# Altium PCB Startup Delay.PcbDoc
Units mm, origin at the board's own origin, x right, y up, seen from the top; angles counter-clockwise.
Board outline 50.04 x 49.15 mm, 2 copper layers (Top Layer, Bottom Layer); 15 components, 9 nets, 249 pads, 4 vias.
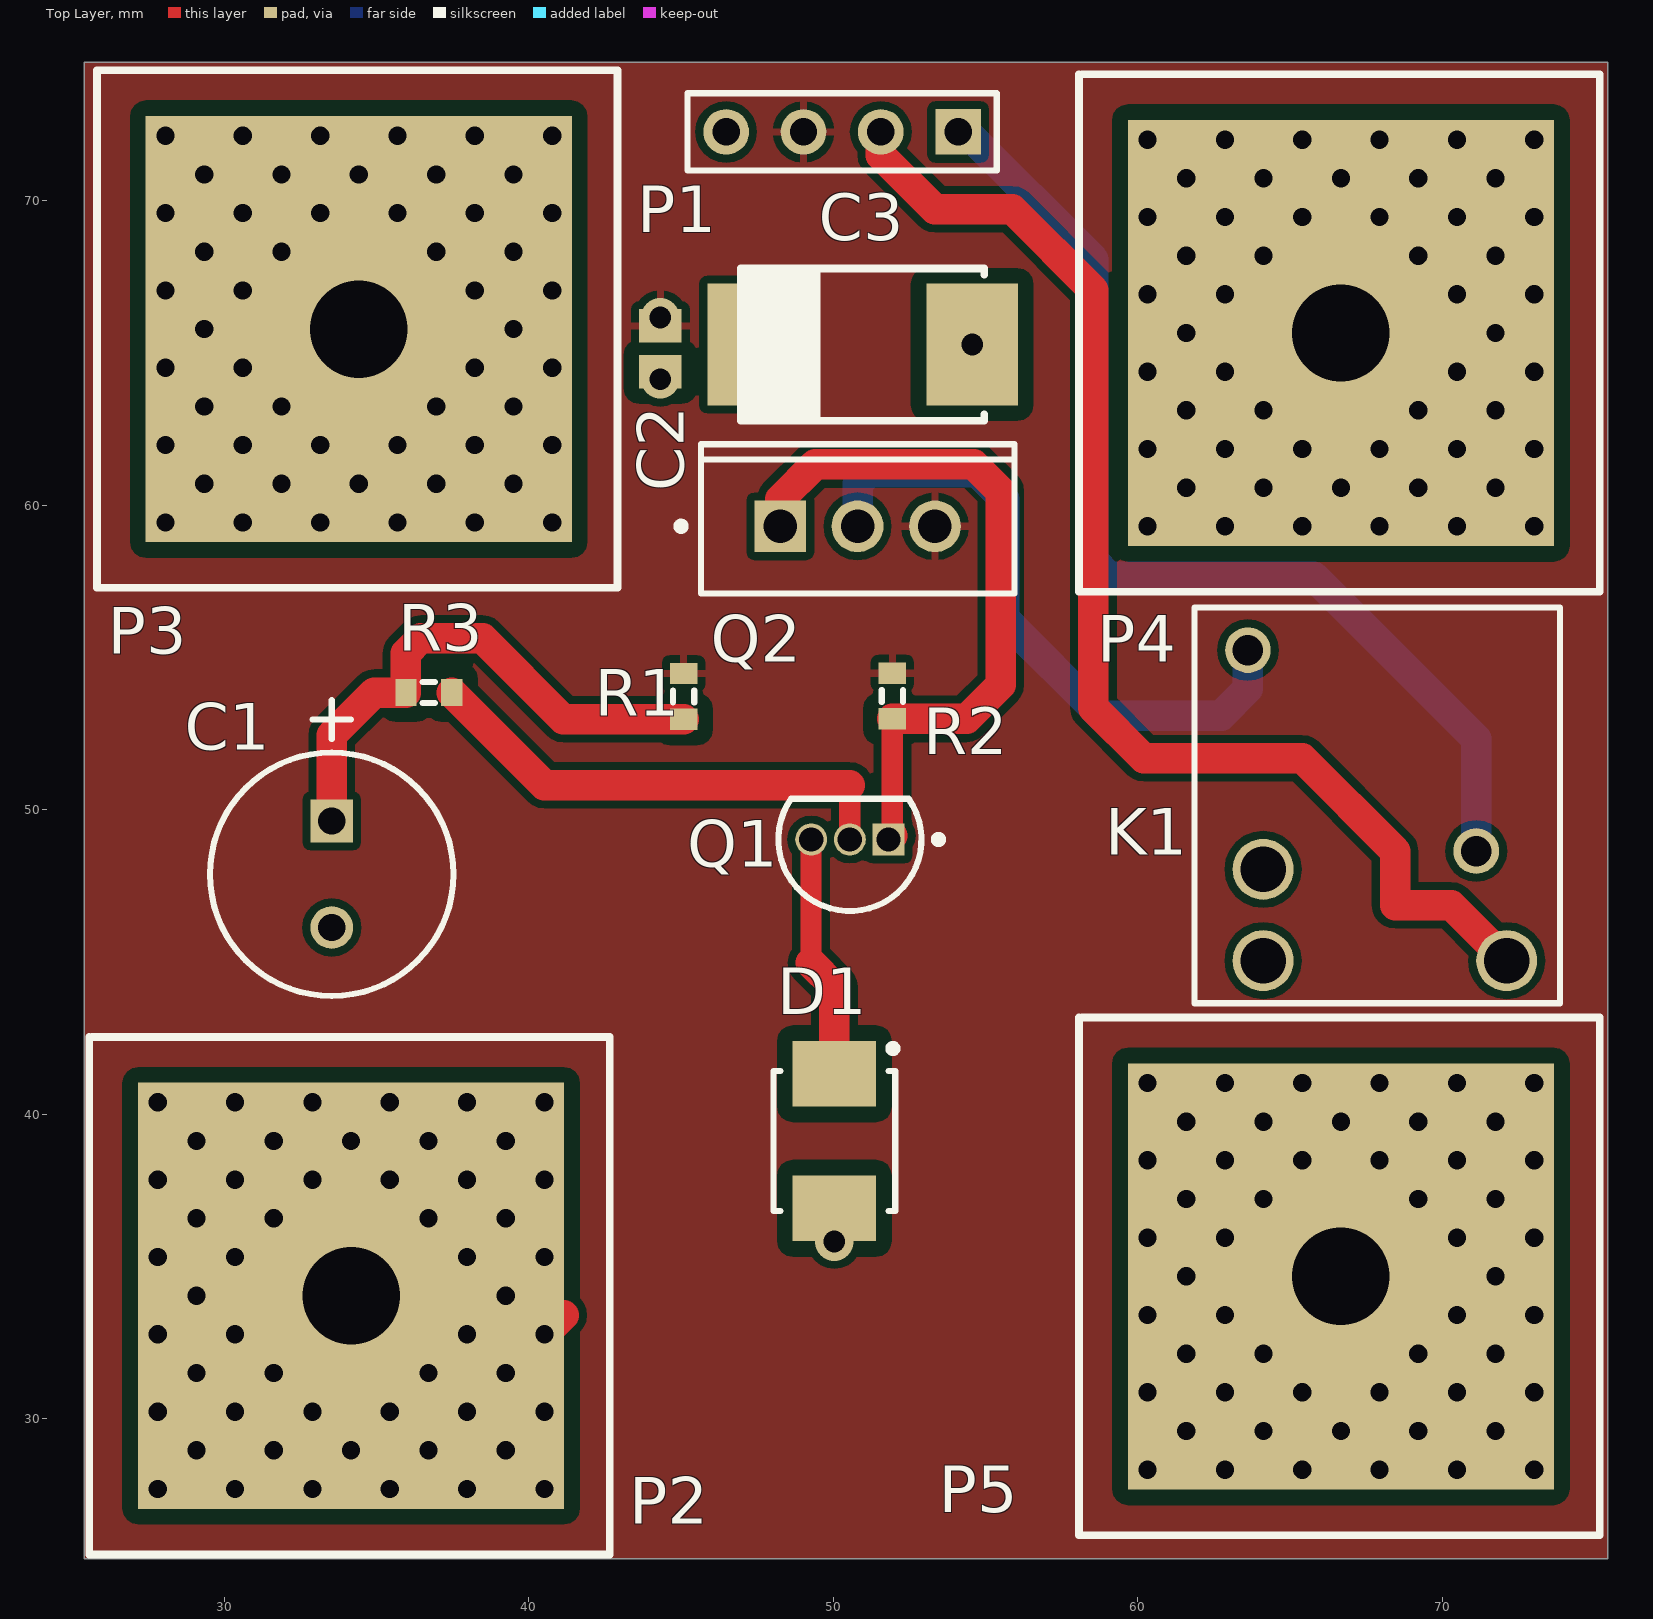
[diagram p0: Top Layer view]
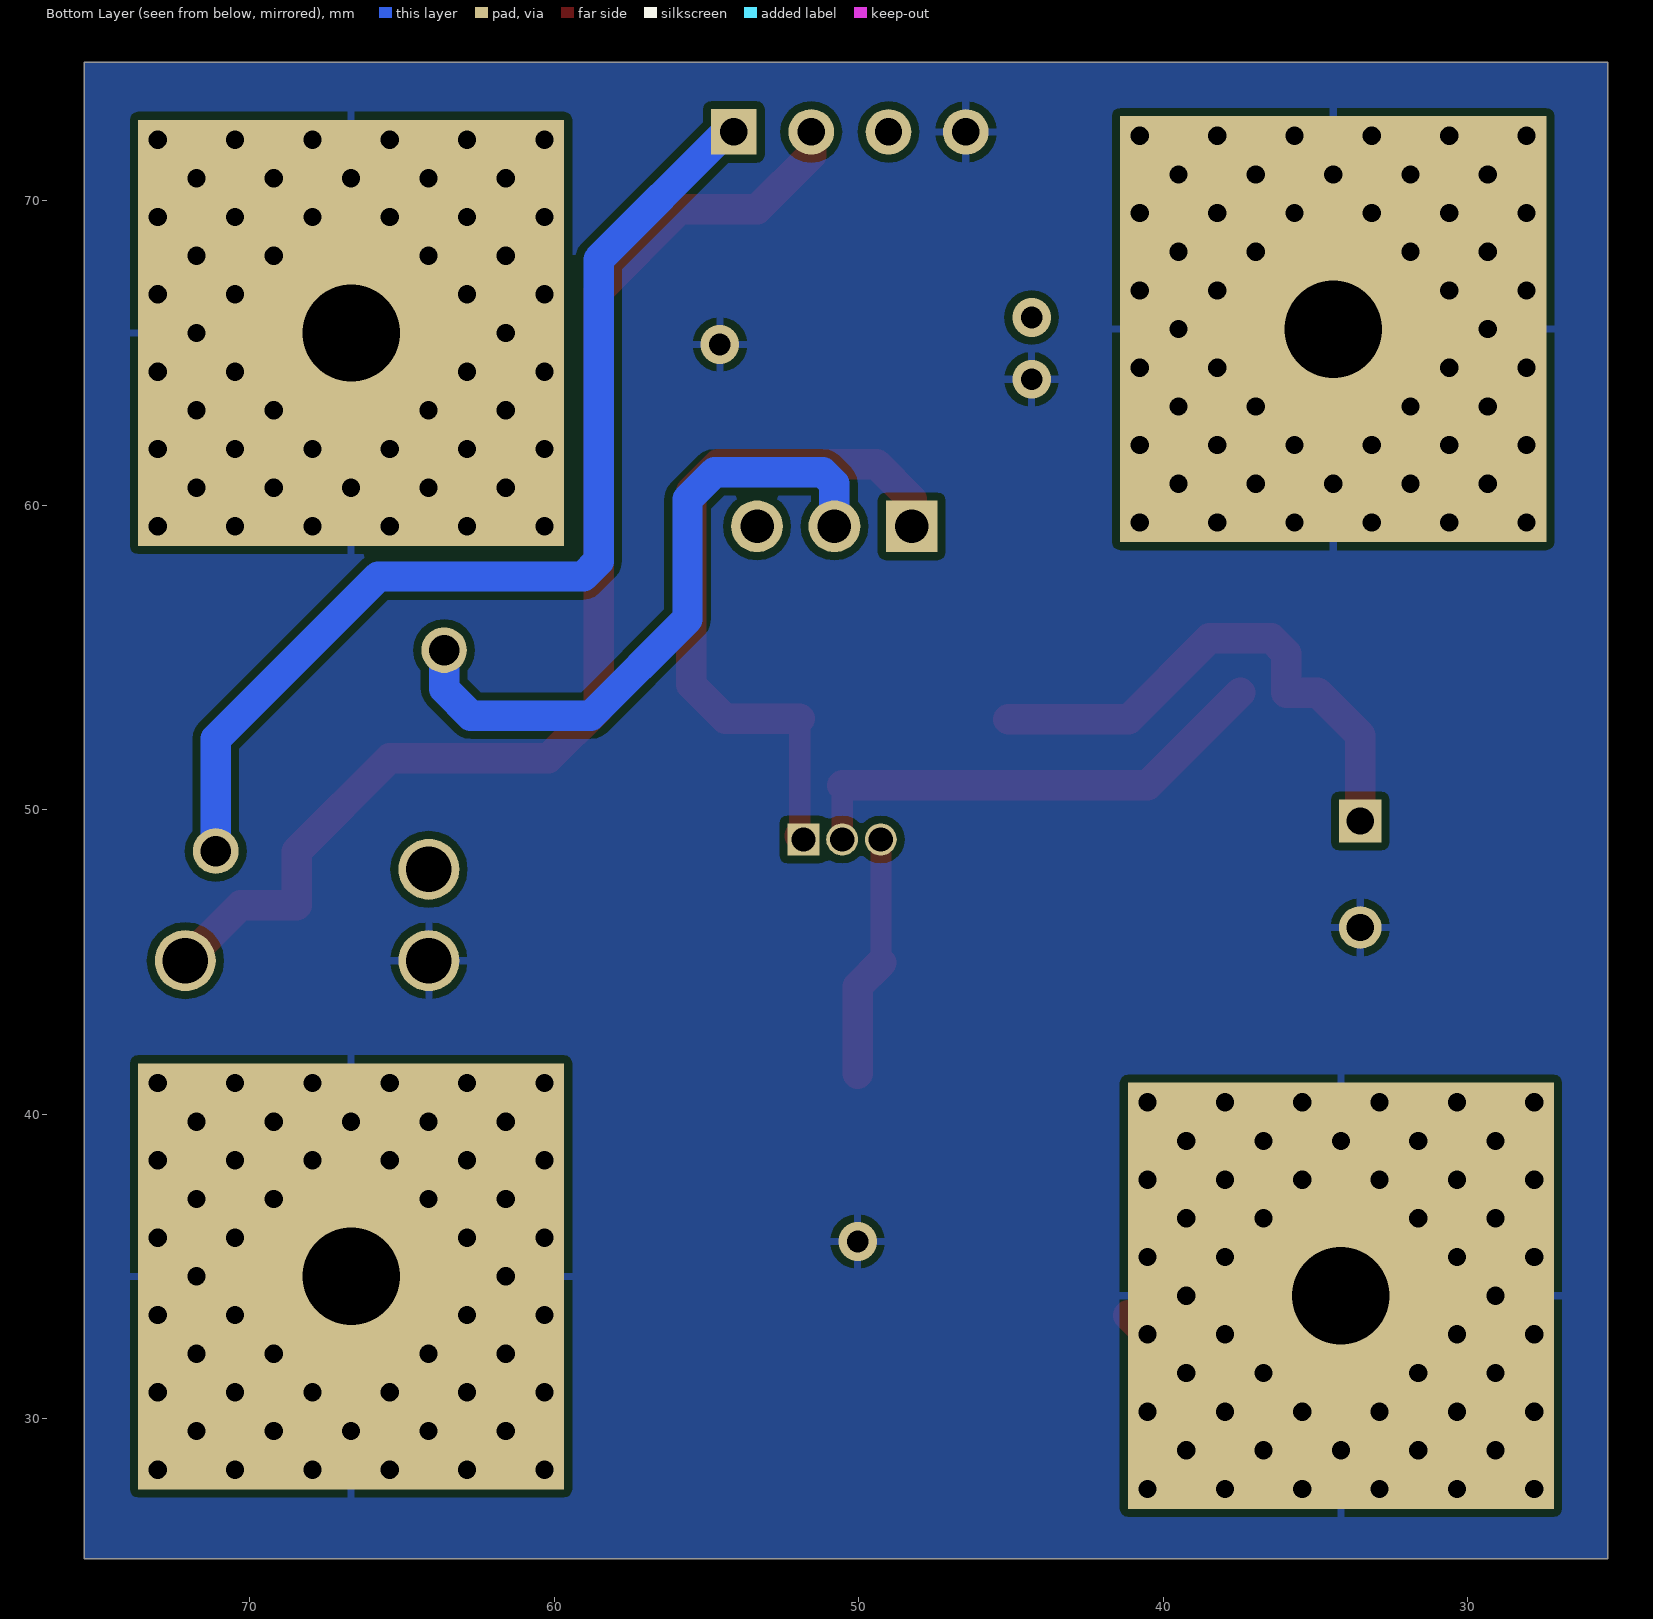
[diagram p1: Bottom Layer view, seen from below]

## Layer stack, top to bottom
Top Solder: solder mask 0.0102, Solder Resist, Dk 3.5
Top Layer: signal copper 0.0356
Dielectric 1: dielectric 0.32, FR-4, Dk 4.8
Bottom Layer: signal copper 0.0356
Bottom Solder: solder mask 0.0102, Solder Resist, Dk 3.5

## Board outline
25.4,25.4 75.438,25.4 75.438,74.549 25.4,74.549

## Design rules (kind name [scope] priority, off if disabled: settings)
Clearance [All] p1: gap=0.254 ignorepadtopadclearanceinfootprint=FALSE except(0: Arc-Hole Track-Hole SMDPad-Hole THPad-Hole Via-Hole Fill-Hole Poly-Hole Region-Hole Text-Hole; 0.152: Arc-THPad Track-THPad THPad-THPad; 0.5: Arc-SMDPad Track-SMDPad SMDPad-SMDPad SMDPad-Fill SMDPad-Poly SMDPad-Region)
HoleSize [All] p1: absolutevalues=TRUE maxlimit=3.2 minlimit=0.025 maxpercent=80.000 minpercent=20.000
PolygonConnect [All] p1: connectstyle=Relief reliefconductorwidth=0.254 reliefentries=4 polygonreliefangle="90 Angle" airgapwidth=0.254
RoomDefinition "Startup Delay" [InComponentClass('Startup Delay')] p1: confinementstyle=ConfineIn formatcopy=TRUE lockcomponents=FALSE outline 25.4,25.4 75.438,25.4 75.438,74.549 25.4,74.549
RoutingVias [All] p1: holewidth=0.711 width=1.27 viastyle="Through Hole" minholewidth=0.711 minwidth=1.27 maxholewidth=0.711 maxwidth=1.27
SolderMaskExpansion [All] p1: expansion=0.102
Width [All] p1: maxlimit=1 minlimit=0.254 preferedwidth=1 minimp=50.000000 maximp=50.000000 favimp=50.000000
29 further rules are at their usual default settings.

## Components (designator, comment, footprint, x,y, rotation, side; value= is the part's Value field where it differs from the comment)
C1 "ECA1HM101" CAPPR65-350-1150X800X1250 33.528,47.879 r270 top
C2 "Cap Pol3" C0805 44.323,65.139 r270 top value=100nF
C3 "Polar Capacitor" "Case D" 51.562,65.278 r180 top
D1 "1SMB5.0AT3" ONSC-SMB-2-403A-03_H_V 50.038,39.116 r270 top
K1 "V23086C1001A403" RELAY_SPDT_5 67.87,50.141 r180 top
P1 "Header 4" HDR1X4 54.102,72.263 r180 top
P2 "Mounting pad" "Mounting pad" 34.163,34.036 r0 top
P3 "Mounting pad" "Mounting pad" 34.417,65.786 r0 top
P4 "Mounting pad" "Mounting pad" 66.675,65.659 r0 top
P5 "Mounting pad" "Mounting pad" 66.675,34.671 r0 top
Q1 "BC549CG" ONSC-TO-92-3-29-04_AD 50.546,49.022 r180 top
Q2 "TIP32A" ONSC-TO-220-3-221A-09 50.8,59.309 r90 top
R1 "Res3" J1-0603 45.085,53.721 r90 top value=100K
R2 "Res3" J1-0603 51.943,53.733 r90 top value=10K
R3 "Res3" J1-0603 36.715,53.848 r180 top value=1K

## Footprints (in the part's own frame and the unit in brackets; to place one, negate y for a bottom-side part, rotate by r counter-clockwise, add the part's x,y. Pads: shape width x height; smd on the part's side, far side on the other; paste and mask are expansions set on the pad)
C0805 [mm] "Chip Capacitor, Body 2.0x1.3mm, IPC High Density"
  rect 1.1x1.4 smd: 1(-0.75,0) 2(0.75,0)
  body extent -1.1,-0.72 1.1,0.72, height 1.4
CAPPR65-350-1150X800X1250 [mm] "THD, 2-Leads, Dia 8mm, Body 11.5mm"
  rect 1.4x1.4 hole 0.9: 1(-1.75,0)
  round 1.4 hole 0.9: 2(1.75,0)
  silkscreen extent -5.71,-4 4,4, body extent -4,-4 4,4, height 12.5
"Case D" [mm]
  rect 3x4 smd: 1(4.2,0) 2(-3,0)
  silkscreen extent -3.4,-2.5 4.6,2.5
HDR1X4 [mm] "Connector; Header; 4 Position"
  rect 1.5x1.5 hole 0.9: 1(0,0)
  round 1.5 hole 0.9: 2(2.54,0) 3(5.08,0) 4(7.62,0)
  silkscreen extent -1.27,-1.27 8.89,1.27
J1-0603 [mm] "Chip Resistor, Body 1.6x0.8mm, IPC High Density"
  rect 0.7x0.9 smd: 1(-0.75,0) 2(0.75,0)
  silkscreen extent -0.2,-0.35 0.2,0.35, body extent -0.85,-0.48 0.85,0.48, height 0.9
"Mounting pad" [mm]
  round 1.1 hole 0.6 mask+0.1: 1(-6.35,-6.35) 1(-6.35,-3.81) 1(-6.35,-1.27) 1(-6.35,1.27) 1(-6.35,3.81) 1(-6.35,6.35) 1(-5.08,-5.08) 1(-5.08,-2.54) 1(-5.08,0) 1(-5.08,2.54) 1(-5.08,5.08) 1(-3.81,-6.35) 1(-3.81,-3.81) 1(-3.81,-1.27) 1(-3.81,1.27) 1(-3.81,3.81) 1(-3.81,6.35) 1(-2.54,-5.08) 1(-2.54,-2.54) 1(-2.54,2.54) 1(-2.54,5.08) 1(-1.27,-6.35) 1(-1.27,-3.81) 1(-1.27,3.81) 1(-1.27,6.35) 1(0,-5.08) 1(0,5.08) 1(1.27,-6.35) 1(1.27,-3.81) 1(1.27,3.81) 1(1.27,6.35) 1(2.54,-5.08) 1(2.54,-2.54) 1(2.54,2.54) 1(2.54,5.08) 1(3.81,-6.35) 1(3.81,-3.81) 1(3.81,-1.27) 1(3.81,1.27) 1(3.81,3.81) 1(3.81,6.35) 1(5.08,-5.08) 1(5.08,-2.54) 1(5.08,0) 1(5.08,2.54) 1(5.08,5.08) 1(6.35,-6.35) 1(6.35,-3.81) 1(6.35,-1.27) 1(6.35,1.27) 1(6.35,3.81) 1(6.35,6.35)
  round 4 / inner round 3.7 / far side round 4 hole 3.2 mask+0.1: 1(0,0)
  rect 14x14 smd: 1(0,0)
  rect 14x14 smd far side: 1(0,0)
  silkscreen extent -8.6,-8.5 8.5,8.5
ONSC-SMB-2-403A-03_H_V [mm] "Molded, 2-Leads, Body 4.6x3.95mm"
  rect 2.159x2.743 smd: 1(-2.21,0) 2(2.21,0)
  silkscreen extent -3.16,-2 2.3,2.05, body extent -2.3,-1.97 2.3,1.97, height 2.42
ONSC-TO-92-3-29-04_AD [mm] "TO, 3-Leads, Body Dia 4.7mm, Pitch 1.27mm"
  rect 1.05x1.05 hole 0.8: 1(-1.27,0)
  round 1.05 hole 0.8: 2(0,0) 3(1.27,0)
  silkscreen extent -3.04,-1.34 2.35,2.35, body extent -2.36,-1.34 2.35,2.36, height 5.33
ONSC-TO-220-3-221A-09 [mm] "FM, 3-Leads, Body 10.3x4.85mm, Pitch 2.54mm"
  rect 1.7x1.7 hole 1.1: 1(0,2.54)
  round 1.7 hole 1.1: 2(0,0) 3(0,-2.54)
  silkscreen extent -2.2,-5.15 2.7,5.92, body extent -2.18,-5.15 2.67,5.15, height 19.85
RELAY_SPDT_5 [mm] "Relay, 5-Leads, Body 12x13mm"
  round 1.5 hole 1: 1(-3.25,1.5) 2(4.25,-5.1)
  round 2 hole 1.5: 3(3.75,5.1) 4(-4.25,5.1) 5(3.75,2.1)
  silkscreen extent -6,-6.5 6,6.5, body extent -6,-6.5 6,6.5, height 9.9

## Part data
C1: library part CMP-2100-03623-1, "Aluminum Electrolytic Capacitor, 100 uF, +/- 20%, 50 V, -40 to 85 degC, 2-Pin THD, RoHS, Bulk", Capacitance=100uF, Case/Package=Radial, Dielectric Material=Aluminium, Leakage Current=3uA, Manufacturer=Panasonic, Max Operating Temperature=85degC, Min Operating Temperature=-40degC, Package Description="2-Pin Radial Lead, Dia 8 mm, Height 12.5 mm", Package Quantity=200, Package Reference=CAPPR65-350-1150X800X1250, Ripple Current=250mA, Tolerance=20%, Voltage=50V, Datasheet URL=https://industrial.panasonic.com/cdbs/www-data/pdf/RDF0000/ABA0000C1218.pdf, Datasheet Version="Rev. 05, 10/2016", Diameter=8mm, Dissipation Factor=0.12%, Height=11.5mm, Height - Seated (Max)=0.492inch, Lead/Base Style=Straight, Lead Diameter=0.6mm, Lead Free=LeadFree, Lead Pitch=3.5mm, Length=11.5mm, Life (Hours)=2000Hour, Manufacturer URL=http://www.panasonic.com/, Mount=ThroughHole, Number of Pins=2, Packaging=Bulk, Polarity=Polar, Radiation Hardening=No, REACH SVHC=NoSVHC, Ripple Current (AC)=250mA, RoHSCompliant=true, Termination=Radial, Voltage Rating=50V, Voltage Rating (DC)=50V
C2: "Polarized Capacitor (Surface Mount)", LatestRevisionDate=29-May-2009, LatestRevisionNote="IPC-7351 Footprint Added.", PackageDescription="Chip Capacitor", PackageReference=C0805, Published=8-Jun-2000, Publisher="Altium Limited"
D1: library part CMP-1061-00353-1, "600 W Peak Power Zener Transient Voltage Suppressor, Unidirectional, 2-Pin SMB, Tape and Reel", Manufacturer="On Semiconductor", ComponentLink1Description="Manufacturer URL", ComponentLink1URL=http://www.onsemi.com/, ComponentLink2Description=Datasheet, ComponentLink2URL=http://www.onsemi.com/pub_link/Collateral/1SMB5.0AT3-D.PDF, ComponentLink3Description="Package Specification", ComponentLink3URL=http://www.onsemi.com/pub_link/Collateral/1SMB5913BT3-D.PDF, DatasheetVersion="Rev. 13", Direction=Unidirectional, IR Max (uA)=800, Mounting Technology="Surface Mount", PackageDescription="2-Pin Small Molded Package, J-Bend Lead, Body 4.33 x 3.625 mm", PackageReference=SMB-2-403A-03_H, PackageVersion="Rev. H, 05/2011", Packing="Tape and Reel", PartNumber=1SMB5.0AT3, PPK Max (W)=600, V(BR) Typ (V)=6.7
K1: library part CMP-1684-00018-1, "TE Connectivity SPDT PCB Mount Automotive Relay, 12V DC Coil, -40 to 105 degC, 5-Pin THD, RoHS", Coil Resistance=254ohm, Coil Voltage=12VDC, Coil Voltage VDC Nom="12 /  / V", Contact Current=30A, Contact Current Max="30 /  / A", Contact Voltage DC Nom=12V, Manufacturer="TE Connectivity", Package Description="5-Leads Through Hole Device, Body 12 x 12.9 mm", Package Reference=THD, Contact Configuration=SPDT, Contact Material=SilverTinOxide, Datasheet URL=http://www.te.com.cn/commerce/DocumentDelivery/DDEController?Action=showdoc&DocId=Data+Sheet%7FV23086-X0000-A001%7F0717%7Fpdf%7FEnglish%7FENG_DS_V23086-X0000-A001_0717.pdf%7F1393280-6, Datasheet Version="Rev. 0717", External Depth="12.9 /  / mm", External Height="9.9 /  / mm", External Width="12 /  / mm", Manufacturer URL=http://www.te.com, Mounting Technology=ThroughHole, Product Range=MicroRelayKSeries, Relay Mounting=ThroughHole, Relay Terminals=Solder, SVHC=ToBeAdvised
P1: "Header, 4-Pin", LatestRevisionDate=17-Jul-2002, LatestRevisionNote="Re-released for DXP Platform.", Publisher="Altium Limited"
Q1: library part CMP-1048-01363-1, "Low Noise Transistor, NPN Silicon, 3-Pin TO-92, Pb-Free, Bulk Box", Manufacturer="On Semiconductor", ComponentLink1Description="Manufacturer URL", ComponentLink1URL=http://www.onsemi.com/, ComponentLink2Description=Datasheet, ComponentLink2URL=http://www.onsemi.com/pub_link/Collateral/BC549B-D.PDF, ComponentLink3Description="Package Specification", ComponentLink3URL=http://www.onsemi.com/pub_link/Collateral/BC549B-D.PDF, DatasheetVersion="Rev. AD", IC Continuous (A)=0.1, Mounting Technology="Through Hole", PackageDescription="3-Pin Transistor Outline, Body 4.825 x 3.685 mm, Pitch 1.27 mm", PackageReference=TO-92-3-29-04_AD, PackageVersion="Rev. AD", Packing="Bulk Box", PartNumber=BC549CG, Polarity=NPN, RoHS=TRUE
Q2: library part CMP-1048-01079-1, "Complementary Silicon Plastic Power Transistor, 3-Pin TO-220, Tube", Manufacturer="On Semiconductor", ComponentLink1Description="Manufacturer URL", ComponentLink1URL=http://www.onsemi.com/, ComponentLink2Description=Datasheet, ComponentLink2URL=http://www.onsemi.com/pub_link/Collateral/TIP31A-D.PDF, ComponentLink3Description="Package Specification", ComponentLink3URL=http://www.onsemi.com/pub_link/Collateral/221A-09.PDF, DatasheetVersion="Rev. 14", fT Min (MHz)=3, IC Continuous (A)=3, Mounting Technology="Through Hole", PackageDescription="3-Pin Flange Mount, Vertical Straight Lead, Body 9.97 x 4.445 mm, Pitch 2.54 mm", PackageReference=TO-220-3-221A-09, PackageVersion="Rev. AG, 09/2011", Packing=Tube, PartNumber=TIP32A, Polarity=PNP, RoHS=FALSE
R1 R2 R3: "Resistor", LatestRevisionDate=29-May-2009, LatestRevisionNote="IPC-7351 Footprint Added.", PackageDescription="Chip Resistor", PackageReference=J1-0603, Published=8-Jun-2000, Publisher="Altium Limited"

## Via types
v1: diameter 1.27, hole 0.711, Top Layer to Bottom Layer, 4 vias

## Nets (pads, with @x,y where several pads share a name; then routed paths per layer and width w, separated by ;. In a path a pad name is that pad's centre, name@x,y a point inside that pad or via, vN(x,y) a via of type N, cw(c..) or ccw(c..) an arc to the next point about the centre after c; other vN are vias at no path point)
+12V: C2.1 C3.1 P1.3 Q2.3 R1.2 R2.2
  other v1: 44.323,66.167
GND: C1.2 C2.2 C3.2 D1.2 K1.3 P1.4 P2.1 P3.1 P4.1 P5.1 | length 1.1
  Top Layer w1: P2.1@40.513,32.766 P2.1@41.148,33.401 ; P4.1@61.468,65.786 P4.1@61.595,65.659
  other v1: 50.038,35.814 44.323,64.135 54.562,65.278
NetC1_1: C1.1 R1.1 R3.2 | length 17.6
  Top Layer w1: C1.1 33.528,52.451 34.925,53.848 R3.2 35.965,55.142 36.449,55.626 38.481,55.626 41.136,52.971 R1.1
NetD1_1: D1.1 Q1.3 | length 8
  Top Layer w0.7: 49.267,44.967 Q1.3@49.267,49.022
  Top Layer w1: 49.267,44.967 50.038,44.196 D1.1
NetK1_1: K1.1 P1.1 | length 34.8
  Bottom Layer w1: P1.1 54.356,72.263 58.547,68.072 58.547,58.166 59.054,57.659 65.785,57.659 71.12,52.324 K1.1
NetK1_2: K1.2 Q2.2 | length 21.6
  Bottom Layer w1: Q2.2 50.8,60.706 51.181,61.087 54.737,61.087 55.626,60.198 55.626,56.261 58.801,53.086 62.738,53.086 63.62,53.968 K1.2
NetK1_4: K1.4 P1.2 | length 41.4
  Top Layer w1: P1.2 51.562,71.501 53.34,69.723 55.88,69.723 58.547,67.056 58.547,53.34 60.198,51.689 65.405,51.689 68.453,48.641 68.453,46.863 70.298,46.863 K1.4
NetQ1_1: Q1.1 Q2.1 R2.1 | length 23.3
  Top Layer w0.7: Q1.1@51.943,49.14 R2.1
  Top Layer w1: Q2.1 48.26,60.198 49.403,61.341 54.61,61.341 55.499,60.452 55.499,54.102 54.38,52.983 R2.1 ; Q1.1@51.825,49.022 Q1.1@51.943,49.14
NetQ1_2: Q1.2 R3.1 | length 16.1
  Top Layer w0.7: Q1.2 50.546,50.8
  Top Layer w1: R3.1 40.513,50.8 50.546,50.8
pads on no net: K1.5

## Polygon pours and split planes (outlines as drawn)
GND on Bottom Layer "Bottom Layer_GND" (solid, pour order 0): 25.4,74.549 75.438,74.549 75.438,25.4 25.4,25.4
+12V on Top Layer "Top_Layer_+12V" (solid, pour order 2): 25.4,74.549 75.438,74.549 75.438,25.4 25.4,25.4

## Silkscreen, mask and mechanical layers (free items; w line width, h text height)
Mechanical 1:
  lines w0.254: 25.4,25.4 25.4,74.549 75.565,74.549 75.565,25.4 25.4,25.4